# Altium PCB Backplane.PcbDoc (part 2 of 3)
Units mil, origin at the board's own origin, x right, y up, seen from the top; angles counter-clockwise.
Board outline 16600 x 5110.24 mil, 4 copper layers (Component Side, Signal Layer 2, Signal Layer 1, Solder Side), stack 33.234 mil thick; 44 components, 199 nets, 1072 pads, 16 vias.
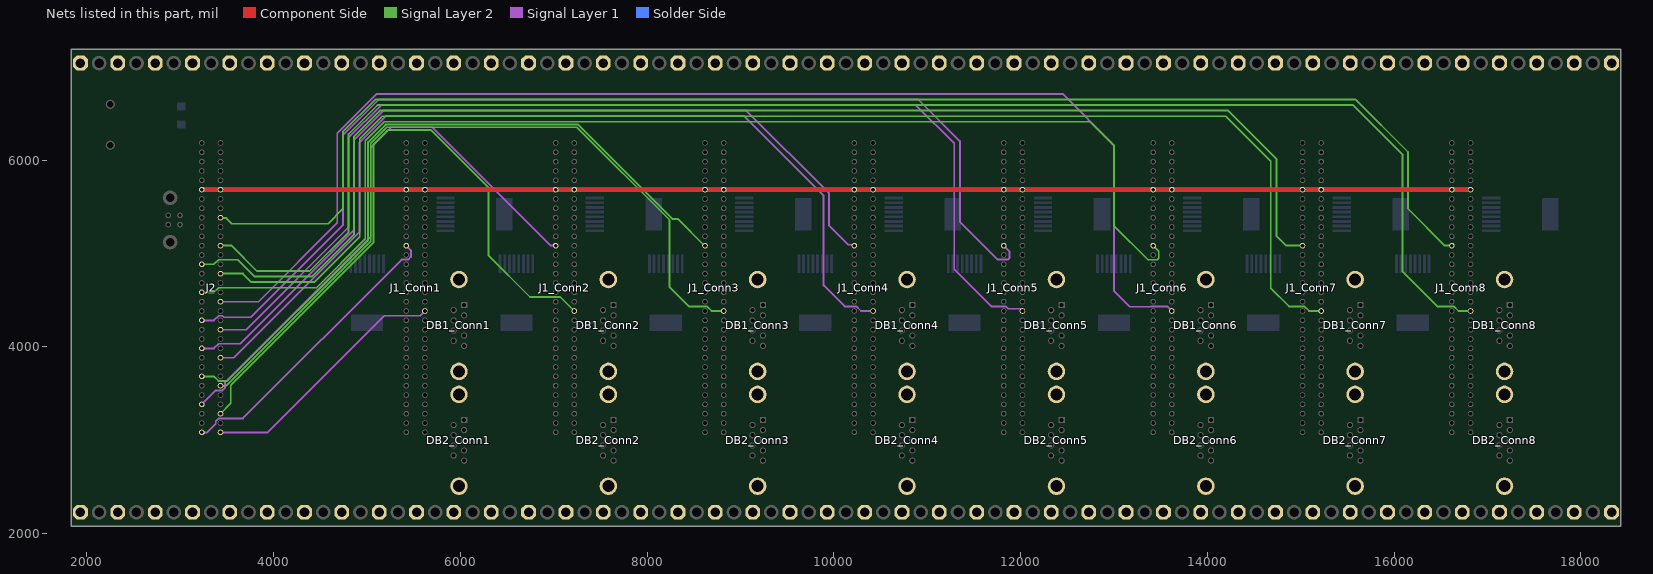
[diagram p4: the nets of this part, all layers, seen from the top]

## Via types
v1: diameter 50, hole 28, Component Side to Solder Side, 16 vias

## Nets (pads, with @x,y where several pads share a name; then routed paths per layer and width w, separated by ;. In a path a pad name is that pad's centre, name@x,y a point inside that pad or via, vN(x,y) a via of type N, cw(c..) or ccw(c..) an arc to the next point about the centre after c; other vN are vias at no path point) (continued)
SDANET: J1_Conn1.5 J1_Conn1.37 J1_Conn2.5 J1_Conn2.37 J1_Conn3.5 J1_Conn3.37 J1_Conn4.5 J1_Conn4.37 J1_Conn5.5 J1_Conn5.37 J1_Conn6.5 J1_Conn6.37 J1_Conn7.5 J1_Conn7.37 J1_Conn8.5 J1_Conn8.37 J2.5 J2.37 | length 27180
  Component Side w50: J2.37@3230,5685 J2.5@3430,5685 J1_Conn1.37@5420,5685 J1_Conn1.5@5620,5685 J1_Conn2.37@7020,5685 J1_Conn2.5@7220,5685 J1_Conn3.37@8620,5685 J1_Conn3.5@8820,5685 J1_Conn4.37@10220,5685 J1_Conn4.5@10420,5685 J1_Conn5.37@11820,5685 J1_Conn5.5@12020,5685 J1_Conn6.37@13420,5685 J1_Conn6.5@13620,5685 J1_Conn7.37@15020,5685 J1_Conn7.5@15220,5685 J1_Conn8.37@16620,5685 J1_Conn8.5@16820,5685
  Solder Side w50: J2.37@3230,5685 J2.5@3430,5685 J1_Conn1.37@5420,5685 J1_Conn1.5@5620,5685 J1_Conn2.37@7020,5685 J1_Conn2.5@7220,5685 J1_Conn3.37@8620,5685 J1_Conn3.5@8820,5685 J1_Conn4.37@10220,5685 J1_Conn4.5@10420,5685 J1_Conn5.37@11820,5685 J1_Conn5.5@12020,5685 J1_Conn6.37@13420,5685 J1_Conn6.5@13620,5685 J1_Conn7.37@15020,5685 J1_Conn7.5@15220,5685 J1_Conn8.37@16620,5685 J1_Conn8.5@16820,5685
SHIELD: DB1_Conn1.0 DB1_Conn2.0 DB1_Conn3.0 DB1_Conn4.0 DB1_Conn5.0 DB1_Conn6.0 DB1_Conn7.0 DB1_Conn8.0 DB2_Conn1.0 DB2_Conn2.0 DB2_Conn3.0 DB2_Conn4.0 DB2_Conn5.0 DB2_Conn6.0 DB2_Conn7.0 DB2_Conn8.0 pad.0@1930,2229 pad.0@1930,7041 pad.0@2330,2229 pad.0@2330,7041 pad.0@2730,2229 pad.0@2730,7041 pad.0@3130,2229 pad.0@3130,7041 pad.0@3530,2229 pad.0@3530,7041 pad.0@3930,2229 pad.0@3930,7041 pad.0@4330,2229 pad.0@4330,7041 pad.0@4730,2229 pad.0@4730,7041 pad.0@5130,2229 pad.0@5130,7041 pad.0@5530,2229 pad.0@5530,7041 pad.0@5930,2229 pad.0@5930,7041 pad.0@6330,2229 pad.0@6330,7041 pad.0@6730,2229 pad.0@6730,7041 pad.0@7130,2229 pad.0@7130,7041 pad.0@7530,2229 pad.0@7530,7041 pad.0@7930,2229 pad.0@7930,7041 pad.0@8330,2229 pad.0@8330,7041 pad.0@8730,2229 pad.0@8730,7041 pad.0@9130,2229 pad.0@9130,7041 pad.0@9530,2229 pad.0@9530,7041 pad.0@9930,2229 pad.0@9930,7041 pad.0@10330,2229 pad.0@10330,7041 pad.0@10730,2229 pad.0@10730,7041 pad.0@11130,2229 pad.0@11130,7041 pad.0@11530,2229 pad.0@11530,7041 pad.0@11930,2229 pad.0@11930,7041 pad.0@12330,2229 pad.0@12330,7041 pad.0@12730,2229 pad.0@12730,7041 pad.0@13130,2229 pad.0@13130,7041 pad.0@13530,2229 pad.0@13530,7041 pad.0@13930,2229 pad.0@13930,7041 pad.0@14330,2229 pad.0@14330,7041 pad.0@14730,2229 pad.0@14730,7041 pad.0@15130,2229 pad.0@15130,7041 pad.0@15530,2229 pad.0@15530,7041 pad.0@15930,2229 pad.0@15930,7041 pad.0@16330,2229 pad.0@16330,7041 pad.0@16730,2229 pad.0@16730,7041 pad.0@17130,2229 pad.0@17130,7041 pad.0@17530,2229 pad.0@17530,7041 pad.0@17930,2229 pad.0@17930,7041 pad.0@18330,2229 pad.0@18330,7041
TXA1: J1_Conn1.18 J2.31 | length 2728.5
  Signal Layer 1 w19.68: J2.31@3430,3085 3935,3085 5184.92,4334.92 5569.92,4334.92 J1_Conn1.18@5620,4385
TXA2: J1_Conn2.18 J2.29 | length 7007.9
  Signal Layer 2 w19.68: J2.29@3430,3285 3540,3395 3540,3590 5070,5120 5070,6170 5222.84,6322.84 5687.16,6322.84 6300,5710 6300,4980 6745.08,4534.92 7070.08,4534.92 J1_Conn2.18@7220,4385
TXA3: J1_Conn3.18 J2.26 | length 8388.2
  Signal Layer 2 w19.68: J2.26@3430,3585 3492.91,3585 5040.24,5132.33 5040.24,6182.33 5210.51,6352.6 7247.4,6352.6 8240,5360 8240,4640 8445.08,4434.92 8640.68,4434.92 8690.6,4385 J1_Conn3.18@8820,4385
TXA4: J1_Conn4.18 J2.23 | length 10051.4
  Signal Layer 1 w19.68: J2.23@3430,3885 3573.83,3885 4920.47,5231.64 4920.47,6192.56 5200.03,6472.13 9037.87,6472.13 9890,5620 9890,4660 10115.08,4434.92 10240.68,4434.92 10290.6,4385 J1_Conn4.18@10420,4385
TXA5: J1_Conn5.18 J2.20 | length 11854.2
  Signal Layer 1 w19.68: J2.20@3430,4185 3705.46,4185 4800.24,5279.78 4800.24,6240.7 5150.72,6591.18 10878.82,6591.18 11290,6180 11290,4830 11685.08,4434.92 11840.68,4434.92 11865.6,4410 11995,4410 J1_Conn5.18@12020,4385
TXA6: J1_Conn6.18 J2.17 | length 13555.7
  Signal Layer 1 w19.68: J2.17@3430,4485 3837.09,4485 4681.18,5329.09 4681.18,6290.01 5101.41,6710.24 12449.76,6710.24 13000,6160 13000,4600 13170,4430 13394.4,4430 13399.32,4434.92 13570.08,4434.92 J1_Conn6.18@13620,4385
TXA7: J1_Conn7.18 J2.14 | length 14839.7
  Signal Layer 2 w19.68: J2.14@3430,4785 3669.45,4785 3760,4694.45 4433.99,4694.45 4921.18,5181.64 4921.18,6231.64 5161.19,6471.65 14198.35,6471.65 14680,5990 14680,4630 14875.08,4434.92 15040.68,4434.92 15090.6,4385 J1_Conn7.18@15220,4385
TXA8: J1_Conn8.18 J2.11 | length 16501.7
  Signal Layer 2 w19.68: J2.11@3430,5085 3549.18,5085 3820.68,4813.5 4384.67,4813.5 4802.13,5230.96 4802.13,6280.96 5111.88,6590.71 15563.01,6590.71 16090,6063.72 16090,4810 16465.08,4434.92 16640.68,4434.92 16690.6,4385 J1_Conn8.18@16820,4385
TXB1: J1_Conn1.43 J2.63 | length 3175.6
  Signal Layer 1 w19.68: J2.63@3230,3085 3286.35,3085 3380.08,3178.73 3380.08,3205.68 3409.32,3234.92 3669.92,3234.92 5370.08,4935.08 5440.68,4935.08 5470,4964.4 5470,5035 J1_Conn1.43@5420,5085
TXB2: J1_Conn2.43 J2.60 | length 6135
  Signal Layer 1 w19.68: J2.60@3230,3385 3380.08,3535.08 3450.68,3535.08 3479.92,3564.32 3479.92,3622.23 5040.24,5182.54 5040.24,6132.33 5260.98,6353.07 5699.02,6353.07 6967.09,5085 J1_Conn2.43@7020,5085
TXB3: J1_Conn3.43 J2.57 | length 7710.2
  Signal Layer 2 w19.68: J2.57@3230,3685 3359.4,3685 3409.32,3635.08 3500.89,3635.08 5010.47,5144.66 5010.47,6194.66 5198.18,6382.36 7259.73,6382.36 8269.76,5372.33 8327.67,5372.33 J1_Conn3.43@8625,5075
TXB4: J1_Conn4.43 J2.54 | length 9394.5
  Signal Layer 1 w19.68: J2.54@3230,3985 3359.4,3985 3409.32,4034.92 3639.57,4034.92 4860.95,5256.3 4860.95,6217.22 5175.38,6531.65 9062.53,6531.65 9949.53,5644.66 9949.53,5300.47 10155,5095 J1_Conn4.43@10210,5095
TXB5: J1_Conn5.43 J2.51 | length 11589.6
  Signal Layer 1 w19.68: J2.51@3230,4285 3359.4,4285 3409.32,4334.92 3450.68,4334.92 3467.46,4318.14 3754.41,4318.14 4740.71,5304.43 4740.71,6265.35 5126.06,6650.71 10903.48,6650.71 11349.53,6204.66 11349.53,5340.47 11754.92,4935.08 11865.08,4935.08 11880,4950 11880,5025 J1_Conn5.43@11820,5085
TXB6: J1_Conn6.43 J2.48 | length 12903.6
  Signal Layer 2 w19.68: J2.48@3230,4585 3359.4,4585 3409.32,4634.92 4458.64,4634.92 4980.71,5156.99 4980.71,6206.99 5185.85,6412.13 12747.87,6412.13 13000,6160 13000,5300 13365.08,4934.92 13464.92,4934.92 13480,4950 13480,5025 J1_Conn6.43@13420,5085
TXB7: J1_Conn7.43 J2.45 | length 14318.7
  Signal Layer 2 w19.68: J2.45@3230,4885 3359.4,4885 3409.32,4934.92 3615.08,4934.92 3796.02,4753.98 4409.33,4753.98 4861.65,5206.3 4861.65,6256.3 5136.54,6531.18 14223,6531.18 14739.53,6014.66 14739.53,5190.47 14845,5085 J1_Conn7.43@15020,5085
TXB8: J1_Conn8.43 J2.8 | length 15255.5
  Signal Layer 2 w19.68: J2.8@3430,5385 3434.76,5380.24 3492.67,5380.24 3552.67,5320.24 4582.33,5320.24 4740.71,5478.62 4740.71,6303.72 5087.22,6650.24 15587.67,6650.24 16149.76,6088.14 16149.76,5480.24 16545,5085 J1_Conn8.43@16620,5085
pads on no net: DB1_Conn1.3 DB1_Conn2.3 DB1_Conn3.3 DB1_Conn4.3 DB1_Conn5.3 DB1_Conn6.3 DB1_Conn7.3 DB1_Conn8.3 DB2_Conn1.3 DB2_Conn2.3 DB2_Conn3.3 DB2_Conn4.3 DB2_Conn5.3 DB2_Conn6.3 DB2_Conn7.3 DB2_Conn8.3 RJ1_Conn1.0 RJ1_Conn1.4 RJ1_Conn1.5 RJ1_Conn2.0 RJ1_Conn2.4 RJ1_Conn2.5 RJ1_Conn3.0 RJ1_Conn3.4 RJ1_Conn3.5 RJ1_Conn4.0 RJ1_Conn4.4 RJ1_Conn4.5 RJ1_Conn5.0 RJ1_Conn5.4 RJ1_Conn5.5 RJ1_Conn6.0 RJ1_Conn6.4 RJ1_Conn6.5 RJ1_Conn7.0 RJ1_Conn7.4 RJ1_Conn7.5 RJ1_Conn8.0 RJ1_Conn8.4 RJ1_Conn8.5 RJ2_Conn1.0 RJ2_Conn1.4 RJ2_Conn1.5 RJ2_Conn2.0 RJ2_Conn2.4 RJ2_Conn2.5 RJ2_Conn3.0 RJ2_Conn3.4 RJ2_Conn3.5 RJ2_Conn4.0 RJ2_Conn4.4 RJ2_Conn4.5 RJ2_Conn5.0 RJ2_Conn5.4 RJ2_Conn5.5 RJ2_Conn6.0 RJ2_Conn6.4 RJ2_Conn6.5 RJ2_Conn7.0 RJ2_Conn7.4 RJ2_Conn7.5 RJ2_Conn8.0 RJ2_Conn8.4 RJ2_Conn8.5 USB1.0

## Polygon pours and split planes (outlines as drawn)
+9V on Solder Side "+9V_L04_P3896" (solid, pour order 3896): 3150,6030 16880,6030 16880,5940 3150,5940
36V on Solder Side "36V_L04_P3897" (solid, pour order 3897): 2090,6490 16880,6490 16880,6040 2090,6040
SHIELD on Solder Side "SHIELD_L04_P3898" (solid, pour order 3898): 1830,2080 18430,2080 18430,7190.23 1830,7190.24
+5VB_Conn2 on Solder Side "Component Side-No Net 2" (solid, pour order 3879): 6957.88,4045.32 7307.88,4045.32 7377.88,4115.31 7377.88,4345.31 7477.88,4445.31 7597.88,4445.31 7597.88,4275.31 7697.88,4275.31 7697.88,4505.31 7367.88,4505.31 7297.88,4435.31 7287.88,4425.31 7287.88,4235.31 6957.88,4235.31
+5VGNDB_Conn2 on Solder Side "Component Side-No Net 2" (solid, pour order 3888): 6957.88,3835.32 7297.88,3835.31 7477.88,4015.32 7477.88,4235.31 7587.88,4235.31 7587.88,4435.31 7487.88,4435.31 7387.88,4335.31 7387.88,4105.32 7317.88,4035.32 6957.88,4035.32
-5VGNDB_Conn2 on Solder Side "Component Side-No Net 2" (solid, pour order 3846): 7487.88,4225.31 7587.88,4225.31 7587.88,3995.32 7327.88,3735.32 6957.88,3735.32 6957.88,3825.31 7307.88,3825.31 7487.88,4005.32
-5VB_Conn2 on Solder Side "Component Side-No Net 2" (solid, pour order 3853): 7597.88,4165.31 7697.88,4165.31 7697.88,3965.32 7367.88,3635.32 6957.88,3635.32 6957.88,3725.32 7337.88,3725.32 7597.88,3985.32
-5VA_Conn2 on Solder Side "Component Side-No Net 2" (solid, pour order 3860): 6957.88,3035.32 7197.88,3035.32 7387.88,2845.32 7387.88,2705.32 7437.88,2655.31 7717.88,2655.32 7717.88,2940.31 7717.88,2945.31 7598.16,2945.31 7597.88,2735.32 7477.88,2735.32 7477.61,2895.59 7247.88,3125.31 6958.2,3125.31
+5VA_Conn2 on Solder Side "Component Side-No Net 2" (solid, pour order 3887): 7597.88,3045.32 7697.88,3045.32 7697.88,3235.32 7467.88,3465.32 7317.88,3615.32 6957.88,3615.32 6957.88,3435.32 7307.88,3435.31 7597.88,3145.31
+5VGNDA_Conn2 on Solder Side "Component Side-No Net 2" (solid, pour order 3864): 7587.88,3015.32 7587.88,3152.12 7314.69,3425.32 6957.88,3425.31 6957.88,3245.31 7277.88,3245.32 7507.88,3015.32
-5VGNDA_Conn2 on Solder Side "Component Side-No Net 2" (solid, pour order 3833): 7587.88,2765.32 7487.88,2765.31 7487.88,2905.32 7437.88,2955.32 7257.88,3135.32 6957.88,3135.31 6957.88,3225.31 7267.88,3225.32 7487.88,3005.32 7497.88,2995.32 7587.88,2995.32
-5VGNDA_Conn3 on Solder Side "Component Side-No Net 2" (solid, pour order 3837): 9177.88,2765.32 9077.88,2765.31 9077.88,2905.32 9027.88,2955.32 8847.88,3135.32 8547.88,3135.31 8547.88,3225.31 8857.88,3225.32 9077.88,3005.32 9087.88,2995.32 9177.88,2995.32
+5VGNDA_Conn3 on Solder Side "Component Side-No Net 2" (solid, pour order 3871): 9177.88,3015.32 9177.88,3162.12 8914.69,3425.32 8547.88,3425.31 8547.88,3245.31 8867.88,3245.32 9097.88,3015.32
+5VA_Conn3 on Solder Side "Component Side-No Net 2" (solid, pour order 3883): 9187.88,3045.32 9287.88,3045.32 9287.88,3235.32 9057.88,3465.32 8907.88,3615.32 8547.88,3615.32 8547.88,3435.32 8897.88,3435.31 9187.88,3145.31
-5VA_Conn3 on Solder Side "Component Side-No Net 2" (solid, pour order 3858): 8547.88,3035.32 8787.88,3035.32 8977.88,2845.32 8977.88,2705.32 9027.88,2655.31 9307.88,2655.32 9307.88,2940.31 9307.88,2945.31 9188.16,2945.31 9187.88,2735.32 9067.88,2735.32 9067.61,2895.59 8837.88,3125.31 8548.2,3125.31
-5VB_Conn3 on Solder Side "Component Side-No Net 2" (solid, pour order 3854): 9187.88,4165.31 9287.88,4165.31 9287.88,3965.32 8957.88,3635.32 8547.88,3635.32 8547.88,3725.32 8927.88,3725.32 9187.88,3985.32
-5VGNDB_Conn3 on Solder Side "Component Side-No Net 2" (solid, pour order 3840): 9077.88,4225.31 9177.88,4225.31 9177.88,3995.32 8917.88,3735.32 8547.88,3735.32 8547.88,3825.31 8897.88,3825.31 9077.88,4005.32
+5VGNDB_Conn3 on Solder Side "Component Side-No Net 2" (solid, pour order 3889): 8547.88,3835.32 8887.88,3835.31 9067.88,4015.32 9067.88,4235.31 9177.88,4235.31 9177.88,4435.31 9077.88,4435.31 8977.88,4335.31 8977.88,4105.32 8907.88,4035.32 8547.88,4035.32
+5VB_Conn3 on Solder Side "+5VB_CONN3_L04_P3876" (solid, pour order 3876): 8547.88,4045.32 8897.88,4045.32 8967.88,4115.31 8967.88,4345.31 9067.88,4445.31 9187.88,4445.31 9187.88,4275.31 9287.88,4275.31 9287.88,4505.31 8957.88,4505.31 8887.88,4435.31 8877.88,4425.31 8877.88,4235.31 8547.88,4235.31
-5VGNDA_Conn4 on Solder Side "Component Side-No Net 2" (solid, pour order 3835): 10777.88,2765.32 10677.88,2765.31 10677.88,2905.32 10627.88,2955.32 10447.88,3135.32 10147.88,3135.31 10147.88,3225.31 10457.88,3225.32 10677.88,3005.32 10687.88,2995.32 10777.88,2995.32
+5VGNDA_Conn4 on Solder Side "Component Side-No Net 2" (solid, pour order 3869): 10777.88,3015.32 10777.88,3162.12 10514.68,3425.32 10147.88,3425.31 10147.88,3245.31 10467.88,3245.32 10697.88,3015.32
+5VA_Conn4 on Solder Side "Component Side-No Net 2" (solid, pour order 3884): 10787.88,3045.32 10887.88,3045.32 10887.88,3235.32 10657.88,3465.32 10507.88,3615.32 10147.88,3615.32 10147.88,3435.32 10497.88,3435.31 10787.88,3145.31
-5VA_Conn4 on Solder Side "Component Side-No Net 2" (solid, pour order 3861): 10147.88,3035.32 10387.88,3035.32 10577.88,2845.32 10577.88,2705.32 10627.88,2655.31 10907.88,2655.32 10907.88,2940.31 10907.88,2945.31 10788.16,2945.31 10787.88,2735.32 10667.88,2735.32 10667.61,2895.59 10437.88,3125.31 10148.2,3125.31
-5VB_Conn4 on Solder Side "Component Side-No Net 2" (solid, pour order 3851): 10787.88,4165.31 10887.88,4165.31 10887.88,3965.32 10557.88,3635.32 10147.88,3635.32 10147.88,3725.32 10527.88,3725.32 10787.88,3985.32
-5VGNDB_Conn4 on Solder Side "Component Side-No Net 2" (solid, pour order 3841): 10677.88,4225.31 10777.88,4225.31 10777.88,3995.32 10517.88,3735.32 10147.88,3735.32 10147.88,3825.31 10497.88,3825.31 10677.88,4005.32
+5VGNDB_Conn4 on Solder Side "Component Side-No Net 2" (solid, pour order 3895): 10147.88,3835.32 10487.88,3835.31 10667.88,4015.32 10667.88,4235.31 10777.88,4235.31 10777.88,4435.31 10677.88,4435.31 10577.88,4335.31 10577.88,4105.32 10507.88,4035.32 10147.88,4035.32
+5VB_Conn4 on Solder Side "Component Side-No Net 2" (solid, pour order 3873): 10147.88,4045.32 10497.88,4045.32 10567.88,4115.31 10567.88,4345.31 10667.88,4445.31 10787.88,4445.31 10787.88,4275.31 10887.88,4275.31 10887.88,4505.31 10557.88,4505.31 10487.88,4435.31 10477.88,4425.31 10477.88,4235.31 10147.88,4235.31
-5VGNDA_Conn5 on Solder Side "Component Side-No Net 2" (solid, pour order 3834): 12377.88,2765.32 12277.88,2765.31 12277.88,2905.32 12227.88,2955.32 12047.88,3135.32 11747.88,3135.31 11747.88,3225.31 12057.88,3225.32 12277.88,3005.32 12287.88,2995.32 12377.88,2995.32
+5VGNDA_Conn5 on Solder Side "Component Side-No Net 2" (solid, pour order 3868): 12377.88,3015.32 12377.88,3162.12 12114.69,3425.32 11747.88,3425.31 11747.88,3245.31 12067.88,3245.32 12297.88,3015.32
+5VA_Conn5 on Solder Side "Component Side-No Net 2" (solid, pour order 3880): 12387.88,3045.32 12487.88,3045.32 12487.88,3235.32 12257.88,3465.32 12107.88,3615.32 11747.88,3615.32 11747.88,3435.32 12097.88,3435.31 12387.88,3145.31
-5VA_Conn5 on Solder Side "Component Side-No Net 2" (solid, pour order 3857): 11747.88,3035.32 11987.88,3035.32 12177.88,2845.32 12177.88,2705.32 12227.88,2655.31 12507.88,2655.32 12507.88,2940.31 12507.88,2945.31 12388.16,2945.31 12387.88,2735.32 12267.88,2735.32 12267.61,2895.59 12037.88,3125.31 11748.2,3125.31
-5VB_Conn5 on Solder Side "-5VB_CONN5_L04_P3852" (solid, pour order 3852): 12387.88,4165.31 12487.88,4165.31 12487.88,3965.32 12157.88,3635.32 11747.88,3635.32 11747.88,3725.32 12127.88,3725.32 12387.88,3985.32
-5VGNDB_Conn5 on Solder Side "Component Side-No Net 2" (solid, pour order 3842): 12277.88,4225.31 12377.88,4225.31 12377.88,3995.32 12117.88,3735.32 11747.88,3735.32 11747.88,3825.31 12097.88,3825.31 12277.88,4005.32
+5VGNDB_Conn5 on Solder Side "Component Side-No Net 2" (solid, pour order 3892): 11747.88,3835.32 12087.88,3835.31 12267.88,4015.32 12267.88,4235.31 12377.88,4235.31 12377.88,4435.31 12277.88,4435.31 12177.88,4335.31 12177.88,4105.32 12107.88,4035.32 11747.88,4035.32
+5VB_Conn5 on Solder Side "Component Side-No Net 2" (solid, pour order 3877): 11747.88,4045.32 12097.88,4045.32 12167.88,4115.31 12167.88,4345.31 12267.88,4445.31 12387.88,4445.31 12387.88,4275.31 12487.88,4275.31 12487.88,4505.31 12157.88,4505.31 12087.88,4435.31 12077.88,4425.31 12077.88,4235.31 11747.88,4235.31
-5VGNDA_Conn6 on Solder Side "Component Side-No Net 2" (solid, pour order 3836): 13977.88,2765.32 13877.88,2765.31 13877.88,2905.32 13827.88,2955.32 13647.88,3135.32 13347.88,3135.31 13347.88,3225.31 13657.88,3225.32 13877.88,3005.32 13887.88,2995.32 13977.88,2995.32
+5VGNDA_Conn6 on Solder Side "Component Side-No Net 2" (solid, pour order 3867): 13977.88,3015.32 13977.88,3162.12 13714.69,3425.32 13347.88,3425.31 13347.88,3245.31 13667.88,3245.32 13897.88,3015.32
+5VA_Conn6 on Solder Side "Component Side-No Net 2" (solid, pour order 3886): 13987.88,3045.32 14087.88,3045.32 14087.88,3235.32 13857.88,3465.32 13707.88,3615.32 13347.88,3615.32 13347.88,3435.32 13697.88,3435.31 13987.88,3145.31
-5VA_Conn6 on Solder Side "Component Side-No Net 2" (solid, pour order 3856): 13347.88,3035.32 13587.88,3035.32 13777.88,2845.32 13777.88,2705.32 13827.88,2655.31 14107.88,2655.32 14107.88,2940.31 14107.88,2945.31 13988.16,2945.31 13987.88,2735.32 13867.88,2735.32 13867.61,2895.59 13637.88,3125.31 13348.2,3125.31
-5VB_Conn6 on Solder Side "-5VB_CONN6_L04_P3848" (solid, pour order 3848): 13987.88,4165.31 14087.88,4165.31 14087.88,3965.32 13757.88,3635.32 13347.88,3635.32 13347.88,3725.32 13727.88,3725.32 13987.88,3985.32
-5VGNDB_Conn6 on Solder Side "Component Side-No Net 2" (solid, pour order 3847): 13877.88,4225.31 13977.88,4225.31 13977.88,3995.32 13717.88,3735.32 13347.88,3735.32 13347.88,3825.31 13697.88,3825.31 13877.88,4005.32
+5VGNDB_Conn6 on Solder Side "Component Side-No Net 2" (solid, pour order 3893): 13347.88,3835.32 13687.88,3835.31 13867.88,4015.32 13867.88,4235.31 13977.88,4235.31 13977.88,4435.31 13877.88,4435.31 13777.88,4335.31 13777.88,4105.32 13707.88,4035.32 13347.88,4035.32
+5VB_Conn6 on Solder Side "Component Side-No Net 2" (solid, pour order 3872): 13347.88,4045.32 13697.88,4045.32 13767.88,4115.31 13767.88,4345.31 13867.88,4445.31 13987.88,4445.31 13987.88,4275.31 14087.88,4275.31 14087.88,4505.31 13757.88,4505.31 13687.88,4435.31 13677.88,4425.31 13677.88,4235.31 13347.88,4235.31
-5VGNDA_Conn7 on Solder Side "Component Side-No Net 2" (solid, pour order 3832): 15577.88,2765.32 15477.88,2765.31 15477.88,2905.32 15427.88,2955.32 15247.88,3135.32 14947.88,3135.31 14947.88,3225.31 15257.88,3225.32 15477.88,3005.32 15487.88,2995.32 15577.88,2995.32
+5VGNDA_Conn7 on Solder Side "Component Side-No Net 2" (solid, pour order 3866): 15577.88,3015.32 15577.88,3162.12 15314.69,3425.32 14947.88,3425.31 14947.88,3245.31 15267.88,3245.32 15497.88,3015.32
+5VA_Conn7 on Solder Side "Component Side-No Net 2" (solid, pour order 3885): 15587.88,3045.32 15687.88,3045.32 15687.88,3235.32 15457.88,3465.32 15307.88,3615.32 14947.88,3615.32 14947.88,3435.32 15297.88,3435.31 15587.88,3145.31
-5VA_Conn7 on Solder Side "Component Side-No Net 2" (solid, pour order 3859): 14947.88,3035.32 15187.88,3035.32 15377.88,2845.32 15377.88,2705.32 15427.88,2655.31 15707.88,2655.32 15707.88,2940.31 15707.88,2945.31 15588.16,2945.31 15587.88,2735.32 15467.88,2735.32 15467.61,2895.59 15237.88,3125.31 14948.2,3125.31
-5VB_Conn7 on Solder Side "Component Side-No Net 2" (solid, pour order 3850): 15587.88,4165.31 15687.88,4165.31 15687.88,3965.32 15357.88,3635.32 14947.88,3635.32 14947.88,3725.32 15327.88,3725.32 15587.88,3985.32
-5VGNDB_Conn7 on Solder Side "Component Side-No Net 2" (solid, pour order 3843): 15477.88,4225.31 15577.88,4225.31 15577.88,3995.32 15317.88,3735.32 14947.88,3735.32 14947.88,3825.31 15297.88,3825.31 15477.88,4005.32
+5VGNDB_Conn7 on Solder Side "Component Side-No Net 2" (solid, pour order 3890): 14947.88,3835.32 15287.88,3835.31 15467.88,4015.32 15467.88,4235.31 15577.88,4235.31 15577.88,4435.31 15477.88,4435.31 15377.88,4335.31 15377.88,4105.32 15307.88,4035.32 14947.88,4035.32
+5VB_Conn7 on Solder Side "Component Side-No Net 2" (solid, pour order 3878): 14947.88,4045.32 15297.88,4045.32 15367.88,4115.31 15367.88,4345.31 15467.88,4445.31 15587.88,4445.31 15587.88,4275.31 15687.88,4275.31 15687.88,4505.31 15357.88,4505.31 15287.88,4435.31 15277.88,4425.31 15277.88,4235.31 14947.88,4235.31
-5VGNDA_Conn8 on Solder Side "Component Side-No Net 2" (solid, pour order 3839): 17177.88,2765.32 17077.88,2765.31 17077.88,2905.32 17027.88,2955.32 16847.88,3135.32 16547.88,3135.31 16547.88,3225.31 16857.88,3225.32 17077.88,3005.32 17087.88,2995.32 17177.88,2995.32
+5VGNDA_Conn8 on Solder Side "Component Side-No Net 2" (solid, pour order 3870): 17177.88,3015.32 17177.88,3162.12 16914.69,3425.32 16547.88,3425.31 16547.88,3245.31 16867.88,3245.32 17097.88,3015.32
+5VA_Conn8 on Solder Side "Component Side-No Net 2" (solid, pour order 3882): 17187.88,3045.32 17287.88,3045.32 17287.88,3235.32 17057.88,3465.32 16907.88,3615.32 16547.88,3615.32 16547.88,3435.32 16897.88,3435.31 17187.88,3145.31
-5VA_Conn8 on Solder Side "Component Side-No Net 2" (solid, pour order 3863): 16547.88,3035.32 16787.88,3035.32 16977.88,2845.32 16977.88,2705.32 17027.88,2655.31 17307.88,2655.32 17307.88,2940.31 17307.88,2945.31 17188.16,2945.31 17187.88,2735.32 17067.88,2735.32 17067.61,2895.59 16837.88,3125.31 16548.2,3125.31
-5VB_Conn8 on Solder Side "-5VB_CONN8_L04_P3849" (solid, pour order 3849): 17187.88,4165.31 17287.88,4165.31 17287.88,3965.32 16957.88,3635.32 16547.88,3635.32 16547.88,3725.32 16927.88,3725.32 17187.88,3985.32
-5VGNDB_Conn8 on Solder Side "Component Side-No Net 2" (solid, pour order 3845): 17077.88,4225.31 17177.88,4225.31 17177.88,3995.32 16917.88,3735.32 16547.88,3735.32 16547.88,3825.31 16897.88,3825.31 17077.88,4005.32
+5VGNDB_Conn8 on Solder Side "Component Side-No Net 2" (solid, pour order 3894): 16547.88,3835.32 16887.88,3835.31 17067.88,4015.32 17067.88,4235.31 17177.88,4235.31 17177.88,4435.31 17077.88,4435.31 16977.88,4335.31 16977.88,4105.32 16907.88,4035.32 16547.88,4035.32
+5VB_Conn8 on Solder Side "Component Side-No Net 2" (solid, pour order 3875): 16547.88,4045.32 16897.88,4045.32 16967.88,4115.31 16967.88,4345.31 17067.88,4445.31 17187.88,4445.31 17187.88,4275.31 17287.88,4275.31 17287.88,4505.31 16957.88,4505.31 16887.88,4435.31 16877.88,4425.31 16877.88,4235.31 16547.88,4235.31
-5VGNDA_Conn1 on Solder Side "Component Side-No Net 2" (solid, pour order 3838): 5980,2770 5880,2770 5880,2910 5830,2960 5650,3140 5350,3140 5350,3230 5660,3230 5880,3010 5890,3000 5980,3000
+5VGNDA_Conn1 on Solder Side "Component Side-No Net 2" (solid, pour order 3865): 5980,3020 5980,3160 5710,3430 5350,3430 5350,3250 5670,3250 5900,3020
+5VA_Conn1 on Solder Side "Component Side-No Net 2" (solid, pour order 3881): 5990,3050 6090,3050 6090,3240 5860,3470 5710,3620 5350,3620 5350,3440 5700,3440 5990,3150
-5VA_Conn1 on Solder Side "Component Side-No Net 2" (solid, pour order 3862): 5350,3040 5590,3040 5780,2850 5780,2710 5830,2660 6110,2660 6110,2945 6110,2950 5990.28,2950 5990,2740 5870,2740 5869.72,2900.28 5640,3130 5350.32,3130
-5VB_Conn1 on Solder Side "Component Side-No Net 2" (solid, pour order 3855): 5990,4170 6090,4170 6090,3970 5760,3640 5350,3640 5350,3730 5730,3730 5990,3990
-5VGNDB_Conn1 on Solder Side "Component Side-No Net 2" (solid, pour order 3844): 5880,4230 5980,4230 5980,4000 5720,3740 5350,3740 5350,3830 5700,3830 5880,4010
+5VGNDB_Conn1 on Solder Side "Component Side-No Net 2" (solid, pour order 3891): 5350,3840 5690,3840 5870,4020 5870,4240 5980,4240 5980,4440 5880,4440 5780,4340 5780,4110 5710,4040 5350,4040
+5VB_Conn1 on Solder Side "Component Side-No Net 2" (solid, pour order 3874): 5350,4050 5700,4050 5770,4120 5770,4350 5870,4450 5990,4450 5990,4280 6090,4280 6090,4510 5760,4510 5690,4440 5680,4430 5680,4240 5350,4240
+5VB_Conn2 on Signal Layer 1 "Component Side-No Net 2" (solid, pour order 3739): 6957.88,4045.32 7307.88,4045.32 7377.88,4115.31 7377.88,4345.31 7477.88,4445.31 7597.88,4445.31 7597.88,4275.31 7697.88,4275.31 7697.88,4505.31 7367.88,4505.31 7297.88,4435.31 7287.88,4425.31 7287.88,4235.31 6957.88,4235.31
+5VGNDB_Conn2 on Signal Layer 1 "Component Side-No Net 2" (solid, pour order 3757): 6957.88,3835.32 7297.88,3835.31 7477.88,4015.32 7477.88,4235.31 7587.88,4235.31 7587.88,4435.31 7487.88,4435.31 7387.88,4335.31 7387.88,4105.32 7317.88,4035.32 6957.88,4035.32
-5VGNDB_Conn2 on Signal Layer 1 "Component Side-No Net 2" (solid, pour order 3708): 7487.88,4225.31 7587.88,4225.31 7587.88,3995.32 7327.88,3735.32 6957.88,3735.32 6957.88,3825.31 7307.88,3825.31 7487.88,4005.32
-5VB_Conn2 on Signal Layer 1 "Component Side-No Net 2" (solid, pour order 3716): 7597.88,4165.31 7697.88,4165.31 7697.88,3965.32 7367.88,3635.32 6957.88,3635.32 6957.88,3725.32 7337.88,3725.32 7597.88,3985.32
-5VA_Conn2 on Signal Layer 1 "Component Side-No Net 2" (solid, pour order 3725): 6957.88,3035.32 7197.88,3035.32 7387.88,2845.32 7387.88,2705.32 7437.88,2655.31 7717.88,2655.32 7717.88,2940.31 7717.88,2945.31 7598.16,2945.31 7597.88,2735.32 7477.88,2735.32 7477.61,2895.59 7247.88,3125.31 6958.2,3125.31
+5VA_Conn2 on Signal Layer 1 "Component Side-No Net 2" (solid, pour order 3751): 7597.88,3045.32 7697.88,3045.32 7697.88,3235.32 7467.88,3465.32 7317.88,3615.32 6957.88,3615.32 6957.88,3435.32 7307.88,3435.31 7597.88,3145.31
+5VGNDA_Conn2 on Signal Layer 1 "Component Side-No Net 2" (solid, pour order 3734): 7587.88,3015.32 7587.88,3135.32 7297.88,3425.32 6957.88,3425.31 6957.88,3245.31 7277.88,3245.32 7507.88,3015.32
-5VGNDA_Conn2 on Signal Layer 1 "Component Side-No Net 2" (solid, pour order 3701): 7587.88,2765.32 7487.88,2765.31 7487.88,2905.32 7437.88,2955.32 7257.88,3135.32 6957.88,3135.31 6957.88,3225.31 7267.88,3225.32 7487.88,3005.32 7497.88,2995.32 7587.88,2995.32
-5VGNDA_Conn3 on Signal Layer 1 "Component Side-No Net 2" (solid, pour order 3698): 9177.88,2765.32 9077.88,2765.31 9077.88,2905.32 9027.88,2955.32 8847.88,3135.32 8547.88,3135.31 8547.88,3225.31 8857.88,3225.32 9077.88,3005.32 9087.88,2995.32 9177.88,2995.32
+5VGNDA_Conn3 on Signal Layer 1 "Component Side-No Net 2" (solid, pour order 3729): 9177.88,3015.32 9177.88,3135.32 8887.88,3425.32 8547.88,3425.31 8547.88,3245.31 8867.88,3245.32 9097.88,3015.32
+5VA_Conn3 on Signal Layer 1 "Component Side-No Net 2" (solid, pour order 3746): 9187.88,3045.32 9287.88,3045.32 9287.88,3235.32 9057.88,3465.32 8907.88,3615.32 8547.88,3615.32 8547.88,3435.32 8897.88,3435.31 9187.88,3145.31
-5VA_Conn3 on Signal Layer 1 "Component Side-No Net 2" (solid, pour order 3720): 8547.88,3035.32 8787.88,3035.32 8977.88,2845.32 8977.88,2705.32 9027.88,2655.31 9307.88,2655.32 9307.88,2940.31 9307.88,2945.31 9188.16,2945.31 9187.88,2735.32 9067.88,2735.32 9067.61,2895.59 8837.88,3125.31 8548.2,3125.31
-5VB_Conn3 on Signal Layer 1 "Component Side-No Net 2" (solid, pour order 3718): 9187.88,4165.31 9287.88,4165.31 9287.88,3965.32 8957.88,3635.32 8547.88,3635.32 8547.88,3725.32 8927.88,3725.32 9187.88,3985.32
-5VGNDB_Conn3 on Signal Layer 1 "Component Side-No Net 2" (solid, pour order 3709): 9077.88,4225.31 9177.88,4225.31 9177.88,3995.32 8917.88,3735.32 8547.88,3735.32 8547.88,3825.31 8897.88,3825.31 9077.88,4005.32
+5VGNDB_Conn3 on Signal Layer 1 "Component Side-No Net 2" (solid, pour order 3754): 8547.88,3835.32 8887.88,3835.31 9067.88,4015.32 9067.88,4235.31 9177.88,4235.31 9177.88,4435.31 9077.88,4435.31 8977.88,4335.31 8977.88,4105.32 8907.88,4035.32 8547.88,4035.32
+5VB_Conn3 on Signal Layer 1 "+5VB_CONN3_L03_P3741" (solid, pour order 3741): 8547.88,4045.32 8897.88,4045.32 8967.88,4115.31 8967.88,4345.31 9067.88,4445.31 9187.88,4445.31 9187.88,4275.31 9287.88,4275.31 9287.88,4505.31 8957.88,4505.31 8887.88,4435.31 8877.88,4425.31 8877.88,4235.31 8547.88,4235.31
-5VGNDA_Conn4 on Signal Layer 1 "Component Side-No Net 2" (solid, pour order 3702): 10777.88,2765.32 10677.88,2765.31 10677.88,2905.32 10627.88,2955.32 10447.88,3135.32 10147.88,3135.31 10147.88,3225.31 10457.88,3225.32 10677.88,3005.32 10687.88,2995.32 10777.88,2995.32
+5VGNDA_Conn4 on Signal Layer 1 "Component Side-No Net 2" (solid, pour order 3735): 10777.88,3015.32 10777.88,3135.32 10487.88,3425.32 10147.88,3425.31 10147.88,3245.31 10467.88,3245.32 10697.88,3015.32
+5VA_Conn4 on Signal Layer 1 "Component Side-No Net 2" (solid, pour order 3749): 10787.88,3045.32 10887.88,3045.32 10887.88,3235.32 10657.88,3465.32 10507.88,3615.32 10147.88,3615.32 10147.88,3435.32 10497.88,3435.31 10787.88,3145.31
-5VA_Conn4 on Signal Layer 1 "Component Side-No Net 2" (solid, pour order 3722): 10147.88,3035.32 10387.88,3035.32 10577.88,2845.32 10577.88,2705.32 10627.88,2655.31 10907.88,2655.32 10907.88,2940.31 10907.88,2945.31 10788.16,2945.31 10787.88,2735.32 10667.88,2735.32 10667.61,2895.59 10437.88,3125.31 10148.2,3125.31
-5VB_Conn4 on Signal Layer 1 "Component Side-No Net 2" (solid, pour order 3717): 10787.88,4165.31 10887.88,4165.31 10887.88,3965.32 10557.88,3635.32 10147.88,3635.32 10147.88,3725.32 10527.88,3725.32 10787.88,3985.32
-5VGNDB_Conn4 on Signal Layer 1 "Component Side-No Net 2" (solid, pour order 3706): 10677.88,4225.31 10777.88,4225.31 10777.88,3995.32 10517.88,3735.32 10147.88,3735.32 10147.88,3825.31 10497.88,3825.31 10677.88,4005.32
+5VGNDB_Conn4 on Signal Layer 1 "Component Side-No Net 2" (solid, pour order 3756): 10147.88,3835.32 10487.88,3835.31 10667.88,4015.32 10667.88,4235.31 10777.88,4235.31 10777.88,4435.31 10677.88,4435.31 10577.88,4335.31 10577.88,4105.32 10507.88,4035.32 10147.88,4035.32
+5VB_Conn4 on Signal Layer 1 "Component Side-No Net 2" (solid, pour order 3738): 10147.88,4045.32 10497.88,4045.32 10567.88,4115.31 10567.88,4345.31 10667.88,4445.31 10787.88,4445.31 10787.88,4275.31 10887.88,4275.31 10887.88,4505.31 10557.88,4505.31 10487.88,4435.31 10477.88,4425.31 10477.88,4235.31 10147.88,4235.31
-5VGNDA_Conn5 on Signal Layer 1 "Component Side-No Net 2" (solid, pour order 3700): 12377.88,2765.32 12277.88,2765.31 12277.88,2905.32 12227.88,2955.32 12047.88,3135.32 11747.88,3135.31 11747.88,3225.31 12057.88,3225.32 12277.88,3005.32 12287.88,2995.32 12377.88,2995.32
+5VGNDA_Conn5 on Signal Layer 1 "Component Side-No Net 2" (solid, pour order 3732): 12377.88,3015.32 12377.88,3135.32 12087.88,3425.32 11747.88,3425.31 11747.88,3245.31 12067.88,3245.32 12297.88,3015.32
+5VA_Conn5 on Signal Layer 1 "Component Side-No Net 2" (solid, pour order 3750): 12387.88,3045.32 12487.88,3045.32 12487.88,3235.32 12257.88,3465.32 12107.88,3615.32 11747.88,3615.32 11747.88,3435.32 12097.88,3435.31 12387.88,3145.31
-5VA_Conn5 on Signal Layer 1 "Component Side-No Net 2" (solid, pour order 3727): 11747.88,3035.32 11987.88,3035.32 12177.88,2845.32 12177.88,2705.32 12227.88,2655.31 12507.88,2655.32 12507.88,2940.31 12507.88,2945.31 12388.16,2945.31 12387.88,2735.32 12267.88,2735.32 12267.61,2895.59 12037.88,3125.31 11748.2,3125.31
-5VB_Conn5 on Signal Layer 1 "-5VB_CONN5_L03_P3714" (solid, pour order 3714): 12387.88,4165.31 12487.88,4165.31 12487.88,3965.32 12157.88,3635.32 11747.88,3635.32 11747.88,3725.32 12127.88,3725.32 12387.88,3985.32
-5VGNDB_Conn5 on Signal Layer 1 "Component Side-No Net 2" (solid, pour order 3704): 12277.88,4225.31 12377.88,4225.31 12377.88,3995.32 12117.88,3735.32 11747.88,3735.32 11747.88,3825.31 12097.88,3825.31 12277.88,4005.32
+5VGNDB_Conn5 on Signal Layer 1 "Component Side-No Net 2" (solid, pour order 3758): 11747.88,3835.32 12087.88,3835.31 12267.88,4015.32 12267.88,4235.31 12377.88,4235.31 12377.88,4435.31 12277.88,4435.31 12177.88,4335.31 12177.88,4105.32 12107.88,4035.32 11747.88,4035.32
+5VB_Conn5 on Signal Layer 1 "Component Side-No Net 2" (solid, pour order 3736): 11747.88,4045.32 12097.88,4045.32 12167.88,4115.31 12167.88,4345.31 12267.88,4445.31 12387.88,4445.31 12387.88,4275.31 12487.88,4275.31 12487.88,4505.31 12157.88,4505.31 12087.88,4435.31 12077.88,4425.31 12077.88,4235.31 11747.88,4235.31
-5VGNDA_Conn6 on Signal Layer 1 "Component Side-No Net 2" (solid, pour order 3696): 13977.88,2765.32 13877.88,2765.31 13877.88,2905.32 13827.88,2955.32 13647.88,3135.32 13347.88,3135.31 13347.88,3225.31 13657.88,3225.32 13877.88,3005.32 13887.88,2995.32 13977.88,2995.32
+5VGNDA_Conn6 on Signal Layer 1 "Component Side-No Net 2" (solid, pour order 3731): 13977.88,3015.32 13977.88,3135.32 13687.88,3425.32 13347.88,3425.31 13347.88,3245.31 13667.88,3245.32 13897.88,3015.32
+5VA_Conn6 on Signal Layer 1 "Component Side-No Net 2" (solid, pour order 3748): 13987.88,3045.32 14087.88,3045.32 14087.88,3235.32 13857.88,3465.32 13707.88,3615.32 13347.88,3615.32 13347.88,3435.32 13697.88,3435.31 13987.88,3145.31
-5VA_Conn6 on Signal Layer 1 "Component Side-No Net 2" (solid, pour order 3726): 13347.88,3035.32 13587.88,3035.32 13777.88,2845.32 13777.88,2705.32 13827.88,2655.31 14107.88,2655.32 14107.88,2940.31 14107.88,2945.31 13988.16,2945.31 13987.88,2735.32 13867.88,2735.32 13867.61,2895.59 13637.88,3125.31 13348.2,3125.31
-5VB_Conn6 on Signal Layer 1 "-5VB_CONN6_L03_P3719" (solid, pour order 3719): 13987.88,4165.31 14087.88,4165.31 14087.88,3965.32 13757.88,3635.32 13347.88,3635.32 13347.88,3725.32 13727.88,3725.32 13987.88,3985.32
-5VGNDB_Conn6 on Signal Layer 1 "Component Side-No Net 2" (solid, pour order 3705): 13877.88,4225.31 13977.88,4225.31 13977.88,3995.32 13717.88,3735.32 13347.88,3735.32 13347.88,3825.31 13697.88,3825.31 13877.88,4005.32
+5VGNDB_Conn6 on Signal Layer 1 "Component Side-No Net 2" (solid, pour order 3755): 13347.88,3835.32 13687.88,3835.31 13867.88,4015.32 13867.88,4235.31 13977.88,4235.31 13977.88,4435.31 13877.88,4435.31 13777.88,4335.31 13777.88,4105.32 13707.88,4035.32 13347.88,4035.32
+5VB_Conn6 on Signal Layer 1 "Component Side-No Net 2" (solid, pour order 3742): 13347.88,4045.32 13697.88,4045.32 13767.88,4115.31 13767.88,4345.31 13867.88,4445.31 13987.88,4445.31 13987.88,4275.31 14087.88,4275.31 14087.88,4505.31 13757.88,4505.31 13687.88,4435.31 13677.88,4425.31 13677.88,4235.31 13347.88,4235.31
-5VGNDA_Conn7 on Signal Layer 1 "Component Side-No Net 2" (solid, pour order 3697): 15577.88,2765.32 15477.88,2765.31 15477.88,2905.32 15427.88,2955.32 15247.88,3135.32 14947.88,3135.31 14947.88,3225.31 15257.88,3225.32 15477.88,3005.32 15487.88,2995.32 15577.88,2995.32
+5VGNDA_Conn7 on Signal Layer 1 "Component Side-No Net 2" (solid, pour order 3733): 15577.88,3015.32 15577.88,3135.32 15287.88,3425.32 14947.88,3425.31 14947.88,3245.31 15267.88,3245.32 15497.88,3015.32
+5VA_Conn7 on Signal Layer 1 "Component Side-No Net 2" (solid, pour order 3744): 15587.88,3045.32 15687.88,3045.32 15687.88,3235.32 15457.88,3465.32 15307.88,3615.32 14947.88,3615.32 14947.88,3435.32 15297.88,3435.31 15587.88,3145.31
-5VA_Conn7 on Signal Layer 1 "Component Side-No Net 2" (solid, pour order 3724): 14947.88,3035.32 15187.88,3035.32 15377.88,2845.32 15377.88,2705.32 15427.88,2655.31 15707.88,2655.32 15707.88,2940.31 15707.88,2945.31 15588.16,2945.31 15587.88,2735.32 15467.88,2735.32 15467.61,2895.59 15237.88,3125.31 14948.2,3125.31
-5VB_Conn7 on Signal Layer 1 "Component Side-No Net 2" (solid, pour order 3712): 15587.88,4165.31 15687.88,4165.31 15687.88,3965.32 15357.88,3635.32 14947.88,3635.32 14947.88,3725.32 15327.88,3725.32 15587.88,3985.32
-5VGNDB_Conn7 on Signal Layer 1 "Component Side-No Net 2" (solid, pour order 3710): 15477.88,4225.31 15577.88,4225.31 15577.88,3995.32 15317.88,3735.32 14947.88,3735.32 14947.88,3825.31 15297.88,3825.31 15477.88,4005.32
+5VGNDB_Conn7 on Signal Layer 1 "Component Side-No Net 2" (solid, pour order 3753): 14947.88,3835.32 15287.88,3835.31 15467.88,4015.32 15467.88,4235.31 15577.88,4235.31 15577.88,4435.31 15477.88,4435.31 15377.88,4335.31 15377.88,4105.32 15307.88,4035.32 14947.88,4035.32
+5VB_Conn7 on Signal Layer 1 "Component Side-No Net 2" (solid, pour order 3737): 14947.88,4045.32 15297.88,4045.32 15367.88,4115.31 15367.88,4345.31 15467.88,4445.31 15587.88,4445.31 15587.88,4275.31 15687.88,4275.31 15687.88,4505.31 15357.88,4505.31 15287.88,4435.31 15277.88,4425.31 15277.88,4235.31 14947.88,4235.31
-5VGNDA_Conn8 on Signal Layer 1 "Component Side-No Net 2" (solid, pour order 3703): 17177.88,2765.32 17077.88,2765.31 17077.88,2905.32 17027.88,2955.32 16847.88,3135.32 16547.88,3135.31 16547.88,3225.31 16857.88,3225.32 17077.88,3005.32 17087.88,2995.32 17177.88,2995.32
+5VGNDA_Conn8 on Signal Layer 1 "Component Side-No Net 2" (solid, pour order 3730): 17177.88,3015.32 17177.88,3135.32 16887.88,3425.32 16547.88,3425.31 16547.88,3245.31 16867.88,3245.32 17097.88,3015.32
+5VA_Conn8 on Signal Layer 1 "Component Side-No Net 2" (solid, pour order 3745): 17187.88,3045.32 17287.88,3045.32 17287.88,3235.32 17057.88,3465.32 16907.88,3615.32 16547.88,3615.32 16547.88,3435.32 16897.88,3435.31 17187.88,3145.31
-5VA_Conn8 on Signal Layer 1 "Component Side-No Net 2" (solid, pour order 3723): 16547.88,3035.32 16787.88,3035.32 16977.88,2845.32 16977.88,2705.32 17027.88,2655.31 17307.88,2655.32 17307.88,2940.31 17307.88,2945.31 17188.16,2945.31 17187.88,2735.32 17067.88,2735.32 17067.61,2895.59 16837.88,3125.31 16548.2,3125.31
-5VB_Conn8 on Signal Layer 1 "-5VB_CONN8_L03_P3715" (solid, pour order 3715): 17187.88,4165.31 17287.88,4165.31 17287.88,3965.32 16957.88,3635.32 16547.88,3635.32 16547.88,3725.32 16927.88,3725.32 17187.88,3985.32
-5VGNDB_Conn8 on Signal Layer 1 "Component Side-No Net 2" (solid, pour order 3711): 17077.88,4225.31 17177.88,4225.31 17177.88,3995.32 16917.88,3735.32 16547.88,3735.32 16547.88,3825.31 16897.88,3825.31 17077.88,4005.32
+5VGNDB_Conn8 on Signal Layer 1 "Component Side-No Net 2" (solid, pour order 3759): 16547.88,3835.32 16887.88,3835.31 17067.88,4015.32 17067.88,4235.31 17177.88,4235.31 17177.88,4435.31 17077.88,4435.31 16977.88,4335.31 16977.88,4105.32 16907.88,4035.32 16547.88,4035.32
+5VB_Conn8 on Signal Layer 1 "Component Side-No Net 2" (solid, pour order 3740): 16547.88,4045.32 16897.88,4045.32 16967.88,4115.31 16967.88,4345.31 17067.88,4445.31 17187.88,4445.31 17187.88,4275.31 17287.88,4275.31 17287.88,4505.31 16957.88,4505.31 16887.88,4435.31 16877.88,4425.31 16877.88,4235.31 16547.88,4235.31
+5VB_Conn1 on Signal Layer 1 "Component Side-No Net 2" (solid, pour order 3743): 5350.24,4048.74 5700.24,4048.74 5770.24,4118.74 5770.24,4348.74 5870.24,4448.74 5990.24,4448.74 5990.24,4278.74 6090.24,4278.74 6090.24,4508.74 5760.24,4508.74 5690.24,4438.74 5680.24,4428.74 5680.24,4238.74 5350.24,4238.74
+5VGNDB_Conn1 on Signal Layer 1 "Component Side-No Net 2" (solid, pour order 3752): 5350.24,3838.74 5690.24,3838.74 5870.24,4018.74 5870.24,4238.74 5980.24,4238.74 5980.24,4438.74 5880.24,4438.74 5780.24,4338.74 5780.24,4108.74 5710.24,4038.74 5350.24,4038.74
-5VGNDB_Conn1 on Signal Layer 1 "Component Side-No Net 2" (solid, pour order 3707): 5880.24,4228.74 5980.24,4228.74 5980.24,3998.74 5720.24,3738.74 5350.24,3738.74 5350.24,3828.74 5700.24,3828.74 5880.24,4008.74
-5VB_Conn1 on Signal Layer 1 "Component Side-No Net 2" (solid, pour order 3713): 5990.24,4168.74 6090.24,4168.74 6090.24,3968.74 5760.24,3638.74 5350.24,3638.74 5350.24,3728.74 5730.24,3728.74 5990.24,3988.74
-5VA_Conn1 on Signal Layer 1 "Component Side-No Net 2" (solid, pour order 3721): 5350.24,3038.74 5590.24,3038.74 5780.24,2848.74 5780.24,2708.74 5830.24,2658.74 6110.24,2658.74 6110.24,2943.74 6110.24,2948.74 5990.51,2948.74 5990.24,2738.74 5870.24,2738.74 5869.96,2899.02 5640.24,3128.74 5350.55,3128.74
+5VA_Conn1 on Signal Layer 1 "Component Side-No Net 2" (solid, pour order 3747): 5990.24,3048.74 6090.24,3048.74 6090.24,3238.74 5860.24,3468.74 5710.24,3618.74 5350.24,3618.74 5350.24,3438.74 5700.24,3438.74 5990.24,3148.74
+5VGNDA_Conn1 on Signal Layer 1 "Component Side-No Net 2" (solid, pour order 3728): 5980.24,3018.74 5980.24,3138.74 5690.24,3428.74 5350.24,3428.74 5350.24,3248.74 5670.24,3248.74 5900.24,3018.74
-5VGNDA_Conn1 on Signal Layer 1 "Component Side-No Net 2" (solid, pour order 3699): 5980.24,2768.74 5880.24,2768.74 5880.24,2908.74 5830.24,2958.74 5650.24,3138.74 5350.24,3138.74 5350.24,3228.74 5660.24,3228.74 5880.24,3008.74 5890.24,2998.74 5980.24,2998.74
GND on Component Side "GND_L01_P3695" (solid, pour order 3695): 1830,2080 18430,2080 18430,7190.23 1830,7190.24